# EAGLE board adafruit permaproto smalls (EAGLE 9.2.2)
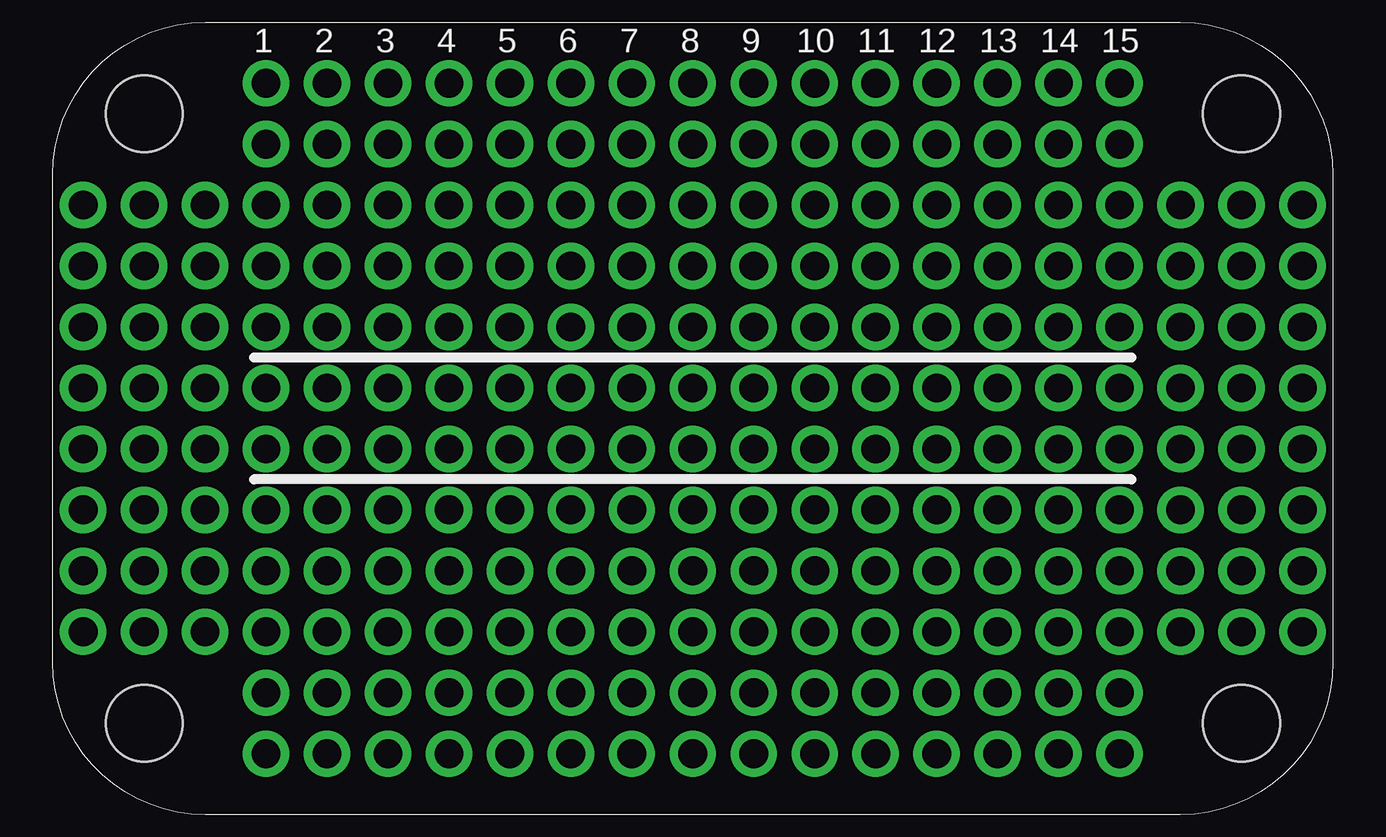
[diagram p0: board, top side]
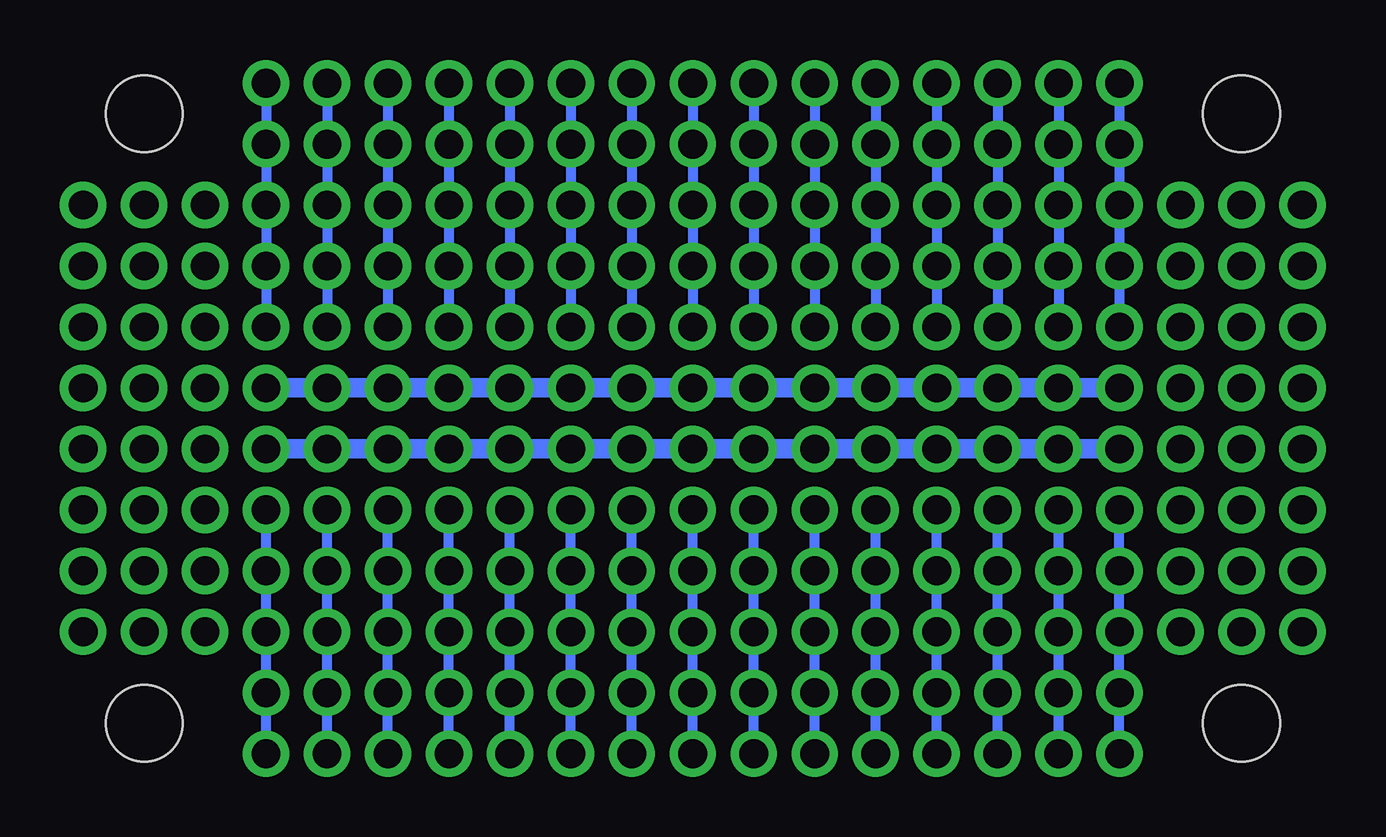
[diagram p1: board, bottom side, seen from below]

No outline drawn. Coordinates in mm, seen from the top.
Copper layers (1*16): Top 0.035mm / dielectric 1.5mm / Bottom 0.035mm
Design rules "default": minimum track width 10mil, minimum drill 24mil, track to track 8mil, track to pad 8mil, pad to pad 8mil, via to via 8mil, smd to smd 8mil, copper to edge 40mil, drill to drill 8mil, minimum pad ring 10mil, minimum via ring 8mil, stop-mask expansion 4mil, vias tented up to drill 0mil, thermal gap 10mil
Holes 3.2 mm at -22.86,12.7 22.86,12.7 -22.86,-12.7 22.86,-12.7

## Placement (x,y rotation side)
U$2  [ALTOIDSSMALLS]  0,0 90 top

## Library data of the parts
U$2 = adafruit

## Tracks (layer width: path | path; a pad name or v marks a point on that pad's centre or on a via)
A  (via drill 1.2 pad 1.93)
  Bottom 0.406: v-17.78,-3.81 v-17.78,-6.35 v-17.78,-8.89 v-17.78,-11.43 v-17.78,-13.97
AA  (via drill 1.2 pad 1.93)
  Bottom 0.406: v-10.16,13.97 v-10.16,11.43 v-10.16,8.89 v-10.16,6.35 v-10.16,3.81
B  (via drill 1.2 pad 1.93)
  Bottom 0.406: v-15.24,-13.97 v-15.24,-11.43 v-15.24,-8.89 v-15.24,-6.35 v-15.24,-3.81
BB  (via drill 1.2 pad 1.93)
  Bottom 0.406: v-12.7,3.81 v-12.7,6.35 v-12.7,8.89 v-12.7,11.43 v-12.7,13.97
C  (via drill 1.2 pad 1.93)
  Bottom 0.406: v-12.7,-3.81 v-12.7,-6.35 v-12.7,-8.89 v-12.7,-11.43 v-12.7,-13.97
CC  (via drill 1.2 pad 1.93)
  Bottom 0.406: v-15.24,3.81 v-15.24,6.35 v-15.24,8.89 v-15.24,11.43 v-15.24,13.97
D  (via drill 1.2 pad 1.93)
  Bottom 0.406: v-10.16,-13.97 v-10.16,-11.43 v-10.16,-8.89 v-10.16,-6.35 v-10.16,-3.81
DD  (via drill 1.2 pad 1.93)
  Bottom 0.406: v-17.78,13.97 v-17.78,11.43 v-17.78,8.89 v-17.78,6.35 v-17.78,3.81
E  (via drill 1.2 pad 1.93)
  Bottom 0.406: v-7.62,-3.81 v-7.62,-6.35 v-7.62,-8.89 v-7.62,-11.43 v-7.62,-13.97
F  (via drill 1.2 pad 1.93)
  Bottom 0.406: v-5.08,-13.97 v-5.08,-11.43 v-5.08,-8.89 v-5.08,-6.35 v-5.08,-3.81
G  (via drill 1.2 pad 1.93)
  Bottom 0.406: v-2.54,-3.81 v-2.54,-6.35 v-2.54,-8.89 v-2.54,-11.43 v-2.54,-13.97
GND  (via drill 1.2 pad 1.93)
  Bottom 0.813: v17.78,1.27 v15.24,1.27 v12.7,1.27 v10.16,1.27 v7.62,1.27 v5.08,1.27 v2.54,1.27 v0,1.27 v-2.54,1.27 v-5.08,1.27 v-7.62,1.27 v-10.16,1.27 v-12.7,1.27 v-15.24,1.27 v-17.78,1.27
H  (via drill 1.2 pad 1.93)
  Bottom 0.406: v0,-13.97 v0,-11.43 v0,-8.89 v0,-6.35 v0,-3.81
I  (via drill 1.2 pad 1.93)
  Bottom 0.406: v2.54,-3.81 v2.54,-6.35 v2.54,-8.89 v2.54,-11.43 v2.54,-13.97
J  (via drill 1.2 pad 1.93)
  Bottom 0.406: v5.08,-3.81 v5.08,-6.35 v5.08,-8.89 v5.08,-11.43 v5.08,-13.97
K  (via drill 1.2 pad 1.93)
  Bottom 0.406: v7.62,-3.81 v7.62,-6.35 v7.62,-8.89 v7.62,-11.43 v7.62,-13.97
L  (via drill 1.2 pad 1.93)
  Bottom 0.406: v10.16,-13.97 v10.16,-11.43 v10.16,-8.89 v10.16,-6.35 v10.16,-3.81
M  (via drill 1.2 pad 1.93)
  Bottom 0.406: v12.7,-3.81 v12.7,-6.35 v12.7,-8.89 v12.7,-11.43 v12.7,-13.97
N  (via drill 1.2 pad 1.93)
  Bottom 0.406: v15.24,-13.97 v15.24,-11.43 v15.24,-8.89 v15.24,-6.35 v15.24,-3.81
N$16  (via drill 1.2 pad 1.93)
  other vias: -20.32,8.89
N$17  (via drill 1.2 pad 1.93)
  other vias: -20.32,6.35
N$18  (via drill 1.2 pad 1.93)
  other vias: -20.32,3.81
N$19  (via drill 1.2 pad 1.93)
  other vias: -22.86,3.81
N$20  (via drill 1.2 pad 1.93)
  other vias: -22.86,6.35
N$21  (via drill 1.2 pad 1.93)
  other vias: -22.86,8.89
N$22  (via drill 1.2 pad 1.93)
  other vias: -25.4,8.89
N$23  (via drill 1.2 pad 1.93)
  other vias: -25.4,6.35
N$24  (via drill 1.2 pad 1.93)
  other vias: -25.4,3.81
N$25  (via drill 1.2 pad 1.93)
  other vias: -25.4,1.27
N$26  (via drill 1.2 pad 1.93)
  other vias: -22.86,1.27
N$27  (via drill 1.2 pad 1.93)
  other vias: -20.32,1.27
N$28  (via drill 1.2 pad 1.93)
  other vias: -20.32,-1.27
N$29  (via drill 1.2 pad 1.93)
  other vias: -22.86,-1.27
N$30  (via drill 1.2 pad 1.93)
  other vias: -25.4,-1.27
N$31  (via drill 1.2 pad 1.93)
  other vias: -25.4,-3.81
N$32  (via drill 1.2 pad 1.93)
  other vias: -22.86,-3.81
N$33  (via drill 1.2 pad 1.93)
  other vias: -20.32,-3.81
N$34  (via drill 1.2 pad 1.93)
  other vias: -20.32,-6.35
N$35  (via drill 1.2 pad 1.93)
  other vias: -22.86,-6.35
N$36  (via drill 1.2 pad 1.93)
  other vias: -25.4,-6.35
N$37  (via drill 1.2 pad 1.93)
  other vias: -25.4,-8.89
N$38  (via drill 1.2 pad 1.93)
  other vias: -22.86,-8.89
N$39  (via drill 1.2 pad 1.93)
  other vias: -20.32,-8.89
N$40  (via drill 1.2 pad 1.93)
  other vias: 20.32,8.89
N$41  (via drill 1.2 pad 1.93)
  other vias: 20.32,6.35
N$42  (via drill 1.2 pad 1.93)
  other vias: 20.32,3.81
N$43  (via drill 1.2 pad 1.93)
  other vias: 22.86,3.81
N$44  (via drill 1.2 pad 1.93)
  other vias: 22.86,6.35
N$45  (via drill 1.2 pad 1.93)
  other vias: 22.86,8.89
N$46  (via drill 1.2 pad 1.93)
  other vias: 25.4,8.89
N$47  (via drill 1.2 pad 1.93)
  other vias: 25.4,6.35
N$65  (via drill 1.2 pad 1.93)
  other vias: 25.4,3.81
N$66  (via drill 1.2 pad 1.93)
  other vias: 25.4,1.27
N$67  (via drill 1.2 pad 1.93)
  other vias: 25.4,-1.27
N$68  (via drill 1.2 pad 1.93)
  other vias: 25.4,-3.81
N$69  (via drill 1.2 pad 1.93)
  other vias: 25.4,-6.35
N$70  (via drill 1.2 pad 1.93)
  other vias: 25.4,-8.89
N$71  (via drill 1.2 pad 1.93)
  other vias: 22.86,-8.89
N$72  (via drill 1.2 pad 1.93)
  other vias: 20.32,-8.89
N$73  (via drill 1.2 pad 1.93)
  other vias: 22.86,-6.35
N$74  (via drill 1.2 pad 1.93)
  other vias: 20.32,-6.35
N$75  (via drill 1.2 pad 1.93)
  other vias: 20.32,-3.81
N$76  (via drill 1.2 pad 1.93)
  other vias: 22.86,-3.81
N$77  (via drill 1.2 pad 1.93)
  other vias: 22.86,-1.27
N$78  (via drill 1.2 pad 1.93)
  other vias: 20.32,-1.27
N$79  (via drill 1.2 pad 1.93)
  other vias: 20.32,1.27
N$80  (via drill 1.2 pad 1.93)
  other vias: 22.86,1.27
O  (via drill 1.2 pad 1.93)
  Bottom 0.406: v17.78,-13.97 v17.78,-11.43 v17.78,-8.89 | v17.78,-8.89 v17.78,-6.35 | v17.78,-6.35 v17.78,-3.81 | v17.78,-8.89 v17.78,-6.35
P  (via drill 1.2 pad 1.93)
  Bottom 0.406: v17.78,3.81 v17.78,6.35 v17.78,8.89 v17.78,11.43 v17.78,13.97
PWR  (via drill 1.2 pad 1.93)
  Bottom 0.813: v17.78,-1.27 v15.24,-1.27 v12.7,-1.27 v10.16,-1.27 v7.62,-1.27 v5.08,-1.27 v2.54,-1.27 v0,-1.27 v-2.54,-1.27 v-5.08,-1.27 v-7.62,-1.27 v-10.16,-1.27 v-12.7,-1.27 v-15.24,-1.27 v-17.78,-1.27
Q  (via drill 1.2 pad 1.93)
  Bottom 0.406: v15.24,13.97 v15.24,11.43 v15.24,8.89 v15.24,6.35 v15.24,3.81
R  (via drill 1.2 pad 1.93)
  Bottom 0.406: v12.7,3.81 v12.7,6.35 v12.7,8.89 v12.7,11.43 v12.7,13.97
S  (via drill 1.2 pad 1.93)
  Bottom 0.406: v10.16,3.81 v10.16,6.35 v10.16,8.89 v10.16,11.43 v10.16,13.97
T  (via drill 1.2 pad 1.93)
  Bottom 0.406: v7.62,13.97 v7.62,11.43 v7.62,8.89 v7.62,6.35 v7.62,3.81
U  (via drill 1.2 pad 1.93)
  Bottom 0.406: v5.08,3.81 v5.08,6.35 v5.08,8.89 v5.08,11.43 v5.08,13.97
V  (via drill 1.2 pad 1.93)
  Bottom 0.406: v2.54,13.97 v2.54,11.43 v2.54,8.89 v2.54,6.35 v2.54,3.81
W  (via drill 1.2 pad 1.93)
  Bottom 0.406: v0,3.81 v0,6.35 v0,8.89 v0,11.43 v0,13.97
X  (via drill 1.2 pad 1.93)
  Bottom 0.406: v-2.54,13.97 v-2.54,11.43 v-2.54,8.89 v-2.54,6.35 v-2.54,3.81
Y  (via drill 1.2 pad 1.93)
  Bottom 0.406: v-5.08,3.81 v-5.08,6.35 v-5.08,8.89 v-5.08,11.43 v-5.08,13.97
Z  (via drill 1.2 pad 1.93)
  Bottom 0.406: v-7.62,13.97 v-7.62,11.43 v-7.62,8.89 v-7.62,6.35 v-7.62,3.81

## Text on the board
tPlace: 1 | 2 | 3 | 4 | 5 | 6 | 7 | 8 | 9 | 10 | 11 | 12 | 13 | 14 | 15
tDocu: Adafruit Perma-Proto Small Tin